# EAGLE board Button V0.2 (EAGLE 9.5.1)
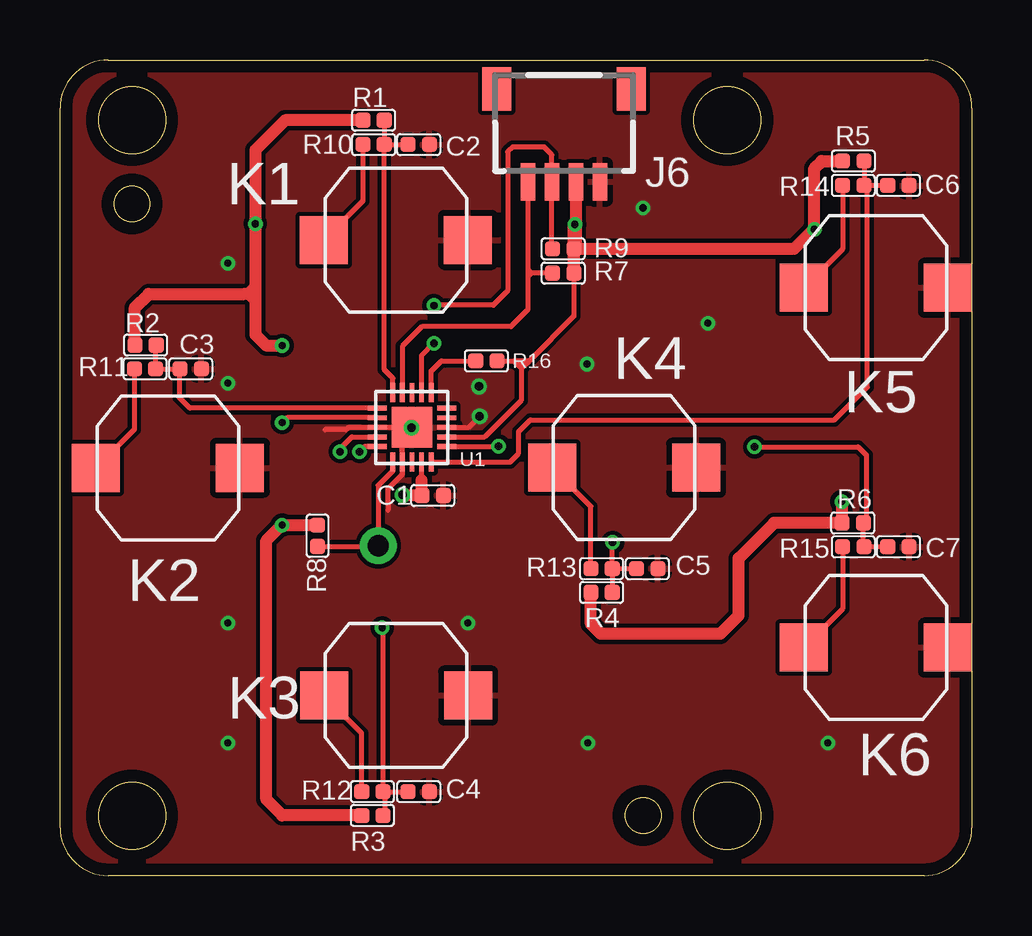
[diagram p0: board, top side]
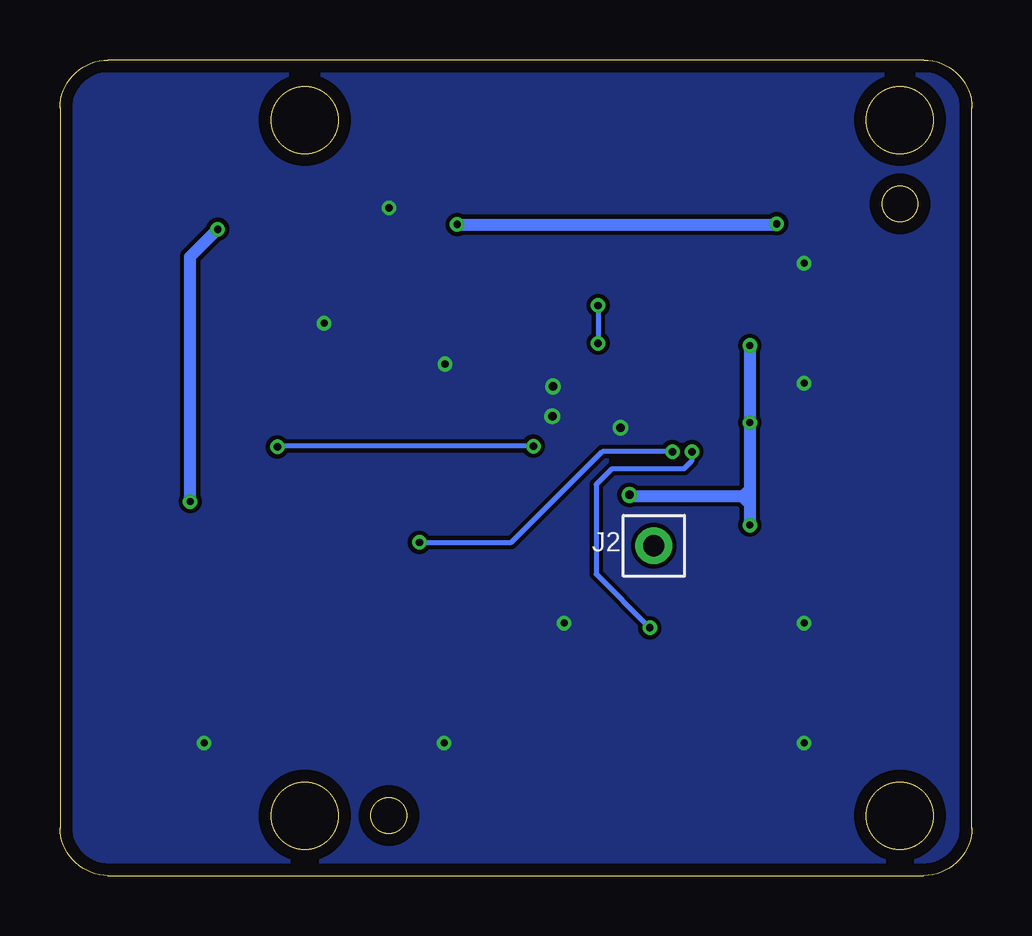
[diagram p1: board, bottom side, seen from below]

Size 38 x 34 mm. Coordinates in mm from the lower left corner, seen from the top.
Outline: 0,2 0,32 arc-90 2,34 36,34 arc-90 38,32 38,2 arc-90 36,0 2,0 arc-90 0,2
Outline: circle at 24.3,2.5 radius 0.75
Outline: circle at 3,28 radius 0.75
Outline: circle at 3,2.5 radius 1.4
Outline: circle at 27.8,2.5 radius 1.4
Outline: circle at 27.8,31.5 radius 1.4
Outline: circle at 3,31.5 radius 1.4
Copper layers (1*16): Top 0.035mm / dielectric 1.5mm / Bottom 0.035mm
Design rules "NOA Eagle Rule *": minimum track width 7mil, minimum drill 0.2mm, track to track 7mil, track to pad 7mil, pad to pad 7mil, via to via 7mil, smd to smd 0mil, copper to edge 20mil, drill to drill 10mil, minimum pad ring 10mil, minimum via ring 6mil, stop-mask expansion 2mil, vias tented up to drill 25mil, thermal gap 10mil
Net classes: 0 Normal: width 0.102 mm, drill 0.2 mm, clearance 0.102 mm

## Footprints (pad centres in the part's own frame; a part is rotated, then mirrored left to right if it is on the bottom)
C0402 = smd 0.635 x 0.635: 1 -0.445,0; 2 0.445,0
1P-60/32MIL = drill 0.889 pad 1.524: P$1 0,0
SM04B-SRSS-TB = smd 0.6 x 1.55: 1 -1.5,2.975; 2 -0.5,2.975; 3 0.5,2.975; 4 1.5,2.975 | smd 1.2 x 1.8: FIT@1 -2.8,-0.9; FIT@2 2.8,-0.9
SKPMAME010 = smd 2 x 2: 1 -3,0; 2 3,0
R0402 = smd 0.635 x 0.635: 1 -0.445,0; 2 0.445,0
QFN-20-3X3MM = smd 0.8 x 0.2: 1 -1.45,0.8; 2 -1.45,0.4; 3 -1.45,0; 4 -1.45,-0.4; 5 -1.45,-0.8; 11 1.45,-0.8; 12 1.45,-0.4; 13 1.45,0; 14 1.45,0.4; 15 1.45,0.8 | smd 0.2 x 0.8: 6 -0.8,-1.45; 7 -0.4,-1.45; 8 0,-1.45; 9 0.4,-1.45; 10 0.8,-1.45; 16 0.8,1.45; 17 0.4,1.45; 18 0,1.45; 19 -0.4,1.45; 20 -0.8,1.45 | smd 1.7 x 1.7: 21 0,0

## Placement (x,y rotation side)
C1  100nF ±10% 10V  [C0402]  15.53,15.84 0 top
C2  100nF ±10% 10V  [C0402]  14.95,30.47 0 top
C3  100nF ±10% 10V  [C0402]  5.45,21.12 0 top
C4  100nF ±10% 10V  [C0402]  14.95,3.5 0 top
C5  100nF ±10% 10V  [C0402]  24.47,12.79 0 top
C6  100nF ±10% 10V  [C0402]  34.94,28.77 0 top
C7  100nF ±10% 10V  [C0402]  34.94,13.71 0 top
J2  [1P-60/32MIL]  13.26,13.75 0 bottom
J6  SM04B-SRSS-TB  [SM04B-SRSS-TB]  21,31.89 180 top
K1  SKPMAME010  [SKPMAME010]  14,26.5 0 top
K2  SKPMAME010  [SKPMAME010]  4.5,17 0 top
K3  SKPMAME010  [SKPMAME010]  14,7.5 0 top
K4  SKPMAME010  [SKPMAME010]  23.51,17.01 0 top
K5  SKPMAME010  [SKPMAME010]  34,24.5 0 top
K6  SKPMAME010  [SKPMAME010]  34,9.5 0 top
R1  10K ±1%  [R0402]  13.07,31.49 180 top
R2  10K ±1%  [R0402]  3.57,22.12 180 top
R3  10K ±1%  [R0402]  13.02,2.51 180 top
R4  10K ±1%  [R0402]  22.57,11.8 180 top
R5  10K ±1%  [R0402]  33.06,29.79 180 top
R6  10K ±1%  [R0402]  33.03,14.7 180 top
R7  4.7K ±1%  [R0402]  20.97,25.11 0 top
R8  10K ±1%  [R0402]  10.73,14.17 90 top
R9  4.7K ±1%  [R0402]  20.97,26.13 0 top
R10  220R ±1%  [R0402]  13.07,30.47 0 top
R11  220R ±1%  [R0402]  3.54,21.12 0 top
R12  220R ±1%  [R0402]  13.02,3.5 0 top
R13  220R ±1%  [R0402]  22.57,12.79 0 top
R14  220R ±1%  [R0402]  33.06,28.77 0 top
R15  220R ±1%  [R0402]  33.06,13.71 0 top
R16  10K ±1%  [R0402]  17.77,21.46 0 top
U1  SX1502I087TRT  [QFN-20-3X3MM]  14.67,18.69 270 top

## Library data of the parts
C1-C7 R1-R16 = RCL
J2 J6 = Connector_NOA
K1-K6 = Discrete_NOA
U1 = IC_NOA

## Nets
+3V3: C1.1 J6.2 R1.2 R2.2 R3.2 R4.2 R5.2 R6.2 R7.2 R8.2 R9.2 R16.2 U1.7 U1.14 U1.17
BUTTON1: C2.1 R1.1 R10.2 U1.5
BUTTON2: C3.1 R2.1 R11.2 U1.6
BUTTON3: C4.1 R3.1 R12.2 U1.9
BUTTON4: C5.1 R4.1 R13.2 U1.10
BUTTON5: C6.1 R5.1 R14.2 U1.15
BUTTON6: C7.1 R6.1 R15.2 U1.16
GND: C1.2 C2.2 C3.2 C4.2 C5.2 C6.2 C7.2 J6.1 K1.2 K2.2 K3.2 K4.2 K5.2 K6.2 U1.8 U1.12 U1.18 U1.21
INT: J2.P$1 R8.1 U1.11
N$1: K1.1 R10.1
N$2: K2.1 R11.1
N$3: K3.1 R12.1
N$4: K4.1 R13.1
N$5: K5.1 R14.1
N$6: K6.1 R15.1
N$9: R16.1 U1.1
SCL: J6.4 R7.1 U1.4
SDA: J6.3 R9.1 U1.2

## Tracks (layer width: path | path; a pad name or v marks a point on that pad's centre or on a via)
+3V3  (via drill 0.3, 0.35)
  Top 0.203: 15.07,16.48 U1.14 | v9.26,18.88 9.47,19.09 U1.7 | U1.17 17.69,18.29 18.78,19.37 19.21,19.8 19.21,21.15 | 14.3,15.84 v14.27,15.87 | R16.2 18.91,21.45 | 18.91,21.45 19.21,21.15 | R7.2 21.41,23.32 19.54,21.45 | 19.54,21.45 19.24,21.45 | 19.24,21.45 18.91,21.45 | 19.21,21.15 19.21,21.43 19.24,21.45 | 19.21,21.15 19.24,21.15 19.54,21.45
  Top 0.254: 8.14,24.71 7.68,24.25 8.01,23.92 8.14,23.92
  Top 0.508: R1.2 9.38,31.49 8.14,30.24 v8.14,27.17 8.14,24.71 8.14,24.25 | 8.14,24.25 8.14,23.92 8.14,22.55 8.59,22.09 v9.26,22.09 | R2.2 3.12,23.68 3.69,24.25 7.68,24.25 8.14,24.25 | R5.2 31.74,29.79 31.43,29.48 v31.43,26.94 31.41,26.94 30.59,26.13 R9.2 | J6.2 21.5,26.22 R9.2 | R9.2 R7.2 21.41,27.11 v21.45,27.14 | R4.2 22.12,10.48 22.53,10.08 27.52,10.08 28.28,10.84 28.28,13.23 29.75,14.7 R6.2 32.59,15.57 v32.57,15.59 | R3.2 9.26,2.51 8.6,3.17 8.6,13.96 v9.24,14.61 v9.26,14.61 R8.2 | 14.3,15.84 C1.1 15.07,15.86 15.07,16.48
  Bottom 0.508: v32.57,15.59 32.57,25.8 v31.43,26.94 | v9.26,22.09 v9.26,18.88 9.26,16.1 | 9.26,16.1 9.26,15.82 | 9.26,15.82 9.26,15.49 | 9.26,15.49 v9.26,14.61 | v21.45,27.14 8.16,27.14 v8.14,27.17 | v14.27,15.87 14.22,15.82 9.54,15.82 | 9.54,15.82 9.26,15.82 | 9.26,16.1 9.54,15.82 | 9.54,15.82 9.54,15.77 9.26,15.49
BUTTON1
  Top 0.203: R1.1 R10.2 | R10.2 C2.1 | R10.2 13.51,21.09 13.87,20.73 U1.5
BUTTON2
  Top 0.203: R2.1 3.99,22.09 R11.2 C3.1 4.96,21.09 4.96,19.93 5.41,19.49 U1.6
BUTTON3  (via drill 0.3)
  Top 0.203: 13.55,3.5 R12.2 13.46,10.29 v13.42,10.33 | 13.55,3.5 C4.1 | R3.1 13.55,2.6 13.55,3.5 | v11.67,17.67 11.67,17.8 12.16,18.29 U1.9
  Bottom 0.203: v13.42,10.33 15.66,12.56 15.66,16.3 15,16.96 12,16.96 11.67,17.29 v11.67,17.67
BUTTON4  (via drill 0.3)
  Top 0.203: R13.2 C5.1 | R13.2 R4.1 | U1.10 12.7,17.89 v12.48,17.67 | R13.2 23.01,13.87 v23.02,13.89
  Bottom 0.203: v23.02,13.89 19.19,13.89 15.4,17.67 v12.48,17.67
BUTTON5
  Top 0.203: C6.1 R14.2 | R5.1 R14.2 | R14.2 33.64,28.63 33.64,20.36 32.27,18.99 19.59,18.99 19.11,18.51 19.11,17.59 18.75,17.24 U1.15
BUTTON6  (via drill 0.3)
  Top 0.203: C7.1 R15.2 33.48,13.73 R6.1 33.6,14.83 33.6,17.53 33.26,17.87 v28.94,17.87 | U1.16 v18.26,17.89 v18.27,17.9
  Bottom 0.203: v18.27,17.9 28.92,17.9 v28.94,17.87
GND  (via drill 0.3, 0.35)
  Top 0.203: U1.18 17.03,18.69 v17.49,19.14 | U1.21 U1.8 13.2,18.67 12,18.67 11.92,18.58 11.03,18.58 | v14.64,18.66 14.27,18.29 U1.12 14.27,16.72 13.66,16.12 13.66,15.62 13.68,15.6 13.68,15.23
  other vias: 24.29,27.83 6.99,10.53 6.99,25.53 16.99,10.53 21.99,5.53 31.99,5.53 6.99,5.53 6.99,20.53 26.99,23.03 21.96,21.32 17.46,20.39
  pour Top: -2.28,36.34 -2.28,-1.66 41.95,-1.66 41.95,36.34
  pour Bottom: -2.28,36.34 -2.28,-1.66 41.95,-1.66 41.95,36.34
INT
  Top 0.203: R8.1 13.23,13.72 J2.P$1 13.26,16.26 13.87,16.87 U1.11
N$1
  Top 0.203: R10.1 12.62,28.12 K1.1
N$2
  Top 0.203: R11.1 3.1,18.6 K2.1
N$3
  Top 0.203: R12.1 12.57,5.93 K3.1
N$4
  Top 0.203: R13.1 22.12,15.39 K4.1
N$5
  Top 0.203: R14.1 32.61,26.12 K5.1
N$6
  Top 0.203: R15.1 32.61,11.12 K6.1
N$9
  Top 0.203: U1.1 15.47,21.04 15.89,21.45 R16.1
SCL
  Top 0.203: J6.4 19.5,25.26 | 19.5,25.26 19.5,25.14 | 19.5,25.14 19.5,24.97 | 19.5,24.97 19.5,23.59 18.78,22.88 15.07,22.88 14.27,22.07 U1.4 | R7.1 19.65,25.11 | 19.65,25.11 19.52,25.11 19.5,25.14 | 19.65,25.11 19.5,24.97 | 19.65,25.11 19.65,25.12 19.5,25.26
SDA  (via drill 0.3)
  Top 0.203: R9.1 20.5,26.15 J6.3 20.5,30.05 20.18,30.37 18.86,30.37 18.65,30.17 18.65,24.38 18.06,23.78 15.59,23.78 v15.58,23.77 | U1.2 15.07,21.68 v15.58,22.19
  Bottom 0.203: v15.58,23.77 v15.58,22.19